# EAGLE board linearni_zdroj (EAGLE 9.5.1)
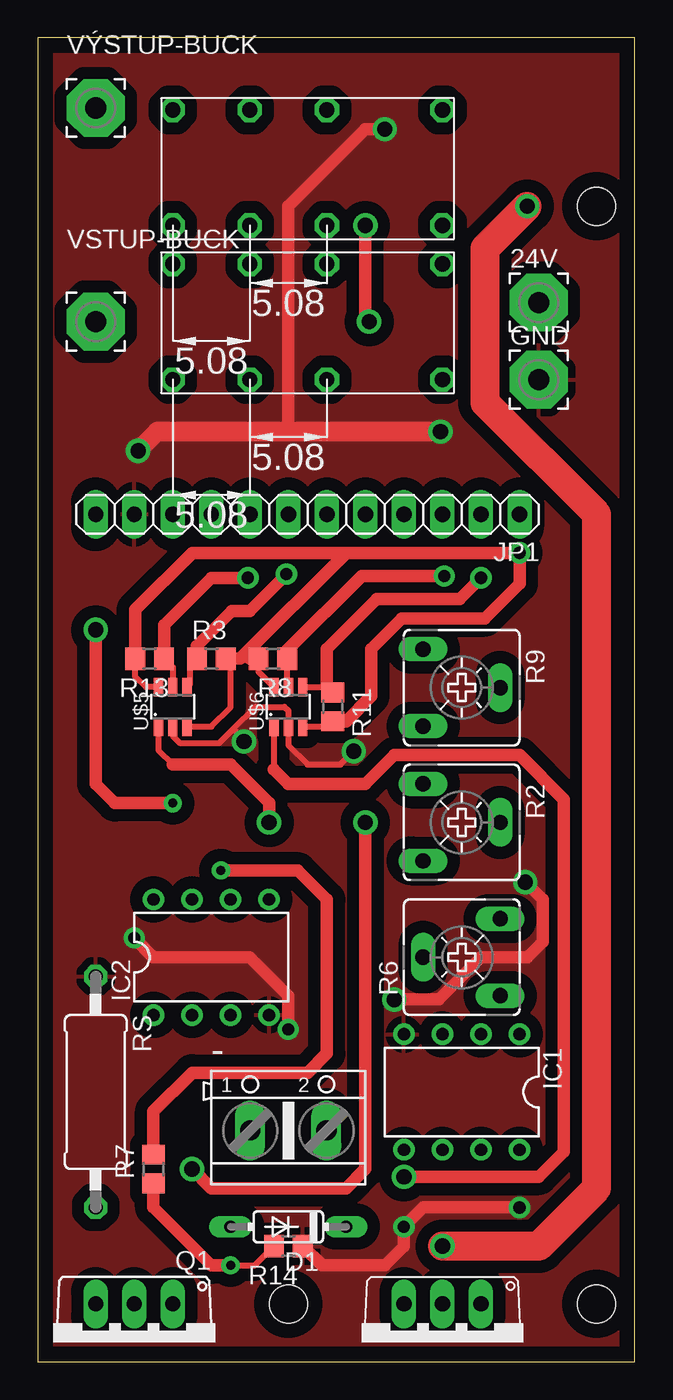
[diagram p0: board, top side]
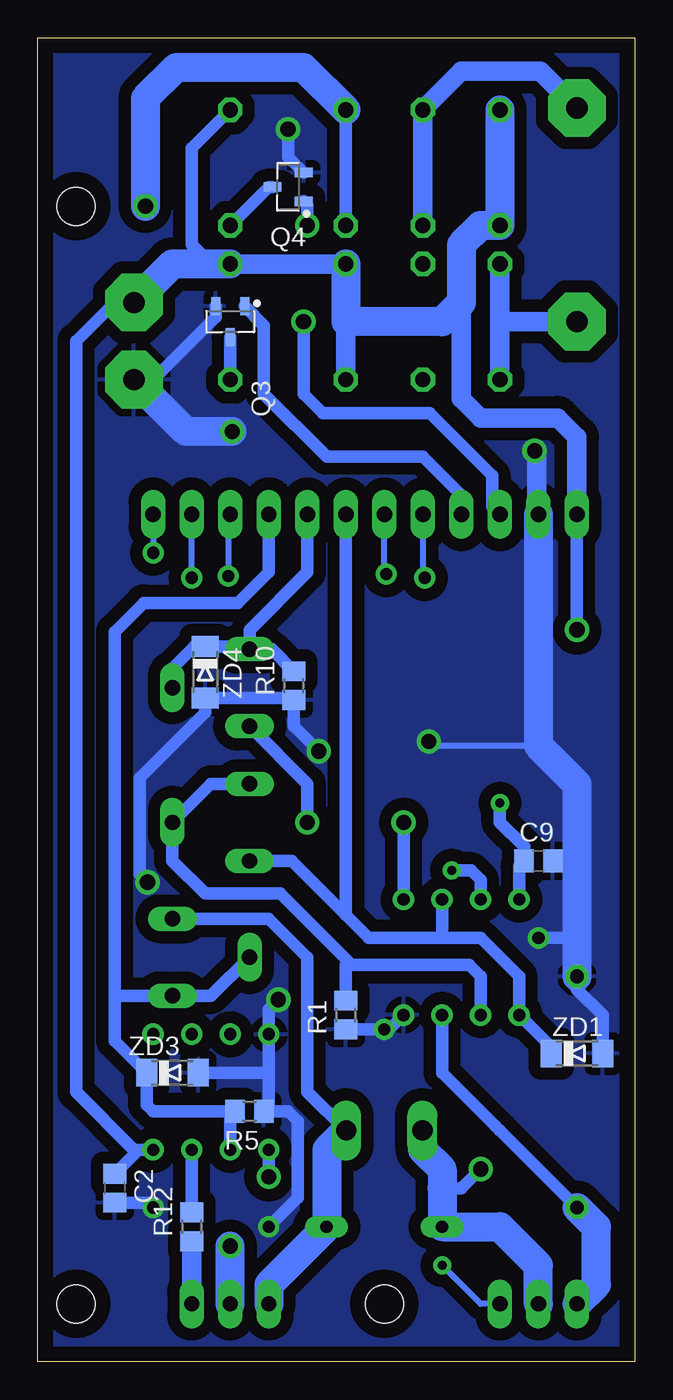
[diagram p1: board, bottom side, seen from below]

Size 39.35 x 87.3 mm. Coordinates in mm from the lower left corner, seen from the top.
Outline: 0,0 39.35,0 39.35,87.3 0,87.3 0,0
Copper layers (1*16): Top 0.035mm / dielectric 1.5mm / Bottom 0.035mm
Design rules "SPS_Trutnov_F14 *": minimum track width 0.3mm, minimum drill 0.6mm, track to track 0.25mm, track to pad 0.2mm, pad to pad 0.2mm, via to via 0.2mm, smd to smd 0mil, copper to edge 1mm, drill to drill 0.6mm, minimum pad ring 0.3mm, minimum via ring 0.3mm, stop-mask expansion 0.1mm, vias tented up to drill 3mm, thermal gap 20mil
Holes 2.5 mm at 36.83,76.2 36.83,3.81 16.51,3.81

## Footprints (pad centres in the part's own frame; a part is rotated, then mirrored left to right if it is on the bottom)
3,81/1,4 = drill 1.397 pad 3.81 octagon: 1 0,0
AK500/2 = drill 1.321 long: 1 -2.515,0; 2 2.515,0
C0805 = smd 1.3 x 1.5: 1 -0.95,0; 2 0.95,0
DO35-7B = drill 0.813 long: A 3.81,0; C -3.81,0
V23105-A5305-A201 = drill 1 octagon: 1 -11.43,-5.08; 4 -3.81,-5.08; 6 1.27,-5.08; 8 6.35,-5.08; 9 6.35,2.54; 11 1.27,2.54; 13 -3.81,2.54; 16 -11.43,2.54
DIL08 = drill 0.813 pad 1.27: 1 -3.81,-3.81; 2 -1.27,-3.81; 3 1.27,-3.81; 4 3.81,-3.81; 5 3.81,3.81; 6 1.27,3.81; 7 -1.27,3.81; 8 -3.81,3.81
1X12 = drill 1.016 long: 1 -13.97,0; 2 -11.43,0; 3 -8.89,0; 4 -6.35,0; 5 -3.81,0; 6 -1.27,0; 7 1.27,0; 8 3.81,0; 9 6.35,0; 10 8.89,0; 11 11.43,0; 12 13.97,0
TO220AV = drill 1.016 long: D 0,-2.54; G -2.54,-2.54; S 2.54,-2.54
TO220V = drill 1.016 long: 1 -2.54,-2.54; 2 0,-2.54; 3 2.54,-2.54
SOT95P240X110-3N = smd 1.182 x 0.612: 1 -1.025,0.95; 2 -1.025,-0.95; 3 1.025,0
R0805 = smd 1.3 x 1.5: 1 -0.95,0; 2 0.95,0
CA6V = drill 1.016 long: A -2.54,-2.54; E 2.54,-2.54; S 0,2.54
0411/15 = drill 0.914 octagon: 1 -7.62,0; 2 7.62,0
TSOT23-6 = smd 0.62 x 1.22: 1 -0.95,-1.3; 2 0,-1.3; 3 0.95,-1.3; 4 0.95,1.3; 5 0,1.3; 6 -0.95,1.3
MINIMELF = smd 1.4 x 1.8: A 1.7,0; C -1.7,0

## Placement (x,y rotation side)
24V  [3,81/1,4]  33.02,69.85 0 top
-  [AK500/2]  16.51,15.24 0 top
C2  10n  [C0805]  34.29,11.43 270 bottom
C9  10n  [C0805]  6.35,33.02 0 bottom
D1  1N4001  [DO35-7B]  16.51,8.89 180 top
ER1  V23105-A5305  [V23105-A5305-A201]  15.24,67.31 180 top
ER2  V23105-A5305  [V23105-A5305-A201]  15.24,77.47 180 top
GND  [3,81/1,4]  33.02,64.77 0 top
IC1  LM358N  [DIL08]  27.94,17.78 180 top
IC2  LM358N  [DIL08]  11.43,26.67 0 top
JP1  [1X12]  17.78,55.88 180 top
Q1  IRFZ34NAV  [TO220AV]  6.35,1.27 180 top
Q2  TIP120  [TO220V]  26.67,1.27 180 top
Q3  2N7002  [SOT95P240X110-3N]  26.67,68.58 270 bottom
Q4  2N7002  [SOT95P240X110-3N]  22.86,77.47 180 bottom
R1  1K  [R0805]  19.05,22.86 90 bottom
R2  10K(9K)  [CA6V]  27.94,35.56 270 top
R3  5K  [R0805]  11.43,46.36 0 top
R5  1K  [R0805]  25.4,16.51 180 bottom
R6  7K(10K)  [CA6V]  27.94,26.67 90 top
R7  20K  [R0805]  7.62,12.7 90 top
R8  5K  [R0805]  15.49,46.36 180 top
R9  10K(7K)  [CA6V]  27.94,44.45 270 top
R10  1K  [R0805]  22.48,44.58 90 bottom
R11  5K  [R0805]  19.43,43.18 270 top
R12  360R  [R0805]  29.21,8.89 90 bottom
R13  5K  [R0805]  7.37,46.36 180 top
R14  100K  [R0805]  16.51,7.62 180 top
RS  0R1  [0411/15]  3.81,17.78 270 top
U$5  MCP4726  [TSOT23-6]  8.89,43.18 0 top
U$6  MCP4726  [TSOT23-6]  16.51,43.18 0 top
VSTUP-BUCK  [3,81/1,4]  3.81,68.58 0 top
VÝSTUP-BUCK  [3,81/1,4]  3.81,82.68 0 top
ZD1  3,3V  [MINIMELF]  3.81,20.32 0 bottom
ZD3  3,3V  [MINIMELF]  30.48,19.05 0 bottom
ZD4  3,3V  [MINIMELF]  28.32,45.47 270 bottom

## Library data of the parts
24V GND VSTUP-BUCK VÝSTUP-BUCK = wirepad
- = con-ptr500; OC_FARNELL: unknown; OC_NEWARK: unknown
C2 C9 = rcl; SPICEPREFIX: C
D1 Q1 ZD1 ZD3 ZD4 = devices
ER1 ER2 = realatka
IC1 IC2 = linear
JP1 = pinhead
Q2 = transistor
Q3 Q4 = NEXPERIA 
R1 R3 R5 R7 R8 R10-R14 RS = rcl; SPICEPREFIX: R
R2 R6 R9 = pot
U$5 U$6 = DAC

## Nets
+: -.2 D1.C Q2.3 R6.E
+3V3: JP1.1 R3.2 R8.2 R11.2 R13.2 U$5.3 U$5.6 U$6.3 U$6.6
+24V: 24V.1 C2.1 C9.1 ER1.1 ER1.4 ER1.13 ER2.1 ER2.8 ER2.9 IC1.8 IC2.8 JP1.12
ADC0: IC2.1 IC2.6 JP1.6 R2.E ZD1.C
ADC1: JP1.5 R9.A R9.S R10.2 ZD4.C
ADC2: IC1.6 JP1.4 R5.2 R6.A R6.S ZD3.C
GND: C2.2 C9.2 GND.1 IC1.4 IC2.4 JP1.11 Q3.2 Q4.2 R1.1 R5.1 R10.1 R14.1 RS.1 U$5.2 U$6.2 ZD1.A ZD3.A ZD4.A
N$1: IC2.7 R7.2
N$2: Q1.G R7.1 R14.2
N$3: IC2.2 R1.2 R2.A R2.S
N$4: Q2.1 R12.1
N$6: IC2.5 U$5.1
N$7: -.1 D1.A Q1.D R9.E
N$9: IC1.5 U$6.1
N$10: ER2.6 ER2.11 VÝSTUP-BUCK.1
N$12: IC1.7 R12.2
N$16: ER1.16 Q3.3
N$17: ER2.16 Q4.3
N$19: ER1.8 ER1.9 VSTUP-BUCK.1
N$20: IC2.3 Q1.S RS.2
NAPAJENI-REG: ER2.4 ER2.13 Q2.2
PA8: JP1.10 Q4.1
PA9: JP1.9 Q3.1
SCL: JP1.8 R13.1 U$5.5
SCL2: JP1.3 R8.1 U$6.5
SDA: JP1.7 R3.1 U$5.4
SDA2: JP1.2 R11.1 U$6.4

## Tracks (layer width: path | path; a pad name or v marks a point on that pad's centre or on a via)
+
  Bottom 0.813: R6.E 24.13,29.21 21.59,26.67 21.59,17.8 -.2
  Bottom 1.905: -.2 20.3,13.97 20.3,8.91 D1.C 24.13,5.08 Q2.3
+3V3  (via drill 0.8)
  Top 0.406: 20.32,42.23 R11.2 19.45,42.22 19.11,41.88 U$6.3 | U$5.3 11.43,41.88 12.7,43.15 12.7,46.36 | R3.2 12.7,46.36 | 13.97,46.36 12.7,46.36 | R8.2 14.54,45.5 U$6.6 | U$5.6 7.13,44.48 6.42,45.19 R13.2
  Top 0.813: 20.32,42.23 21.97,43.88 21.97,46.99 24,49.02 29.46,49.02 31.75,51.31 v31.75,53.34 20.32,53.34 | 20.32,53.34 13.34,46.36 R3.2 | 20.32,53.34 10.16,53.34 6.42,49.6 R13.2 | R8.2 13.97,46.36
  Bottom 0.406: JP1.1 v31.75,53.34
+24V  (via drill 0.6, 1)
  Top 0.813: v8.89,36.83 5.08,36.83 3.81,38.1 v3.81,48.26
  Bottom 0.813: 24V.1 34.29,69.85 36.83,67.31 36.83,17.78 33.02,13.97 IC1.8 32.7,13.97 C2.1 | v3.81,48.26 JP1.12 | IC2.8 7.62,32.7 C9.1 7.3,33.97 8.89,35.56 v8.89,36.83 | ER1.1 27.94,72.39 29.21,73.66 29.21,80.01 ER2.1
  Bottom 1.27: JP1.12 3.81,60.96 5.08,62.23 10.16,62.23 11.43,63.5 11.43,69.85 | ER1.13 19.05,68.58 | ER1.4 ER1.1
  Bottom 1.905: ER2.8 ER2.9 10.16,74.93 11.43,73.66 11.43,69.85 12.7,68.58 19.05,68.58 ER1.4 | ER1.1 30.48,72.39 24V.1
ADC0
  Bottom 0.813: ZD1.C 5.51,20.75 IC2.1 7.62,25.4 10.16,27.94 12.7,27.94 | 12.7,27.94 17.53,27.94 19.05,29.46 | 19.05,29.46 22.61,33.02 R2.E | IC2.6 12.7,27.94 | JP1.6 19.05,29.46
ADC1
  Bottom 0.813: JP1.5 21.59,52.07 25.4,48.26 R9.A | R10.2 23.94,46.99 R9.A | R9.A 25.58,47.17 ZD4.C 29.03,47.17 30.48,45.72 R9.S
ADC2
  Bottom 0.813: IC1.6 26.67,16.19 R5.2 31.75,16.51 32.18,16.94 ZD3.C 34.29,21.16 34.29,24.13 | R6.S 27.94,24.13 R6.A 34.29,24.13 | JP1.4 24.13,52.07 26.16,50.04 32.38,50.04 34.29,48.13 34.29,24.13
GND  (via drill 0.8, 1)
  Top 0.406: v20.83,40.26 19.94,39.37 17.78,39.37 16.51,40.64 U$6.2 16.51,42.93 16.26,43.18 14.35,43.18 12.89,41.72 | U$5.2 8.89,41.28 9.4,40.77 11.94,40.77 12.89,41.72 | 12.89,41.72 13.59,41.02 v13.59,40.89
  Top 0.813: v32.13,31.62 33.27,30.48 33.27,27.69 32.26,26.67 29.21,26.67 26.42,23.88 v23.5,23.88 | v31.75,10.16 25.4,10.16 v24.13,8.89 24.13,7.62 22.86,6.35 18.73,6.35 R14.1 | v16.51,21.91 16.51,24.13 13.97,26.67 7.62,26.67 v6.35,27.94 | 16.51,61.34 16.51,76.2 21.59,81.28 v22.86,81.28
  Top 1.27: v26.54,61.34 16.51,61.34 7.87,61.34 v6.6,60.07
  Bottom 0.406: v13.59,40.89 13.34,40.64 6.35,40.64
  Bottom 0.813: 24.13,19.05 24.13,16.83 R5.1 22.86,16.51 22.23,15.88 22.23,10.79 v24.13,8.89 | 24.13,19.05 IC1.4 24.13,23.24 v23.5,23.88 | ZD3.A 24.13,19.05 | ZD1.A 2.11,22.86 3.81,24.56 RS.1 | v20.83,40.26 22.48,41.91 R10.1 22.62,43.77 ZD4.A 28.32,42.8 32.64,38.48 32.64,32.13 v32.13,31.62 | C9.2 3.81,33.02 | v31.75,10.16 32.07,10.48 C2.2 | R1.1 v16.51,21.91 16.19,21.91 IC2.4 | v6.35,27.94 3.81,27.94 | Q3.2 27.62,68.9 31.75,64.77 GND.1 | v22.86,81.28 22.86,79.44 Q4.2
  Bottom 1.27: v6.6,60.07 6.48,59.94 6.48,56.01 JP1.11
  Bottom 1.905: JP1.11 6.35,40.64 3.81,38.1 3.81,33.02 3.81,27.94 RS.1 | v26.54,61.34 29.59,61.34 GND.1
  pour Top (isolate 0.813): 0,0 39.37,0 39.37,87.25 0,87.25
  pour Bottom (isolate 0.813): 0,0 39.5,0 39.5,87.25 0,87.25
N$1  (via drill 0.6)
  Top 0.813: R7.2 7.62,16.51 10.16,19.05 17.78,19.05 19.05,20.32 19.05,30.48 17.14,32.38 v12.06,32.38
  Bottom 0.813: IC2.7 10.16,31.75 10.79,32.38 v12.06,32.38
N$2  (via drill 0.6)
  Top 0.406: 7.62,11.43 R7.1 | R14.2 14.29,6.35 v12.7,6.35
  Top 0.813: v12.7,6.35 11.43,6.35 7.62,10.16 7.62,11.43
  Bottom 0.406: Q1.G 10.16,3.81 v12.7,6.35
N$3
  Bottom 0.813: R2.A 27.94,38.1 R2.S 30.48,33.02 28.32,30.86 23.37,30.86 18.67,26.16 | IC2.2 10.16,25.4 10.92,26.16 18.67,26.16 | 18.67,26.16 19.05,26.16 R1.2
N$4
  Bottom 1.27: Q2.1 R12.1
N$6  (via drill 1)
  Top 0.406: U$5.1 7.94,40.32 8.89,39.37
  Top 0.813: v15.24,35.56 15.24,36.83 12.7,39.37 8.89,39.37
  Bottom 0.813: IC2.5 v15.24,35.56
N$7  (via drill 1)
  Top 0.813: v10.16,12.7 11.43,11.43 20.32,11.43 21.59,12.7 v21.59,35.56
  Bottom 0.813: R9.E 21.59,38.1 v21.59,35.56 | v10.16,12.7 11.43,11.43 12.7,11.43
  Bottom 1.905: Q1.D 6.35,6.35 8.89,8.89 D1.A 12.7,11.43 12.7,12.7 13.99,13.99 -.1
N$9  (via drill 1)
  Top 0.406: U$6.1 15.56,39.05
  Top 0.813: v24.13,12.19 33.02,12.19 34.67,13.84 34.67,37.08 31.75,40.01 23.5,40.01 21.59,38.1 16.51,38.1 15.56,39.05
  Bottom 0.813: IC1.5 v24.13,12.19
N$10
  Bottom 1.27: VÝSTUP-BUCK.1 6.22,85.09 11.43,85.09 ER2.6 ER2.11
N$12
  Bottom 0.813: R12.2 IC1.7
N$16
  Bottom 0.813: Q3.3 ER1.16
N$17
  Bottom 0.813: Q4.3 24.13,77.47 ER2.16
N$19
  Bottom 1.27: ER1.9 8.89,68.58 | 8.89,68.58 ER1.8 | VSTUP-BUCK.1 8.89,68.58
N$20
  Bottom 0.813: IC2.3 12.7,19.05 9.21,15.56 8.89,15.24 RS.2
  Bottom 1.905: Q1.S 2.54,5.08 2.54,8.89 RS.2
NAPAJENI-REG  (via drill 1)
  Top 1.905: v32.26,76.2 29.46,73.41 29.46,63.25 36.83,55.88 36.83,11.43 33.02,7.62 v26.67,7.62
  Bottom 0.813: ER2.13 ER2.4
  Bottom 1.905: Q2.2 v26.67,7.62 | ER2.4 21.85,85.35 30.22,85.35 32.26,83.31 v32.26,76.2
PA8  (via drill 1)
  Top 0.813: v21.84,68.58 21.59,68.83 v21.59,74.93
  Bottom 0.813: JP1.10 9.4,56.39 9.4,58.42 13.53,62.55 20.57,62.55 21.84,63.82 v21.84,68.58 | v21.59,74.93 21.59,76.27 Q4.1
PA9
  Bottom 0.813: JP1.9 11.43,57.15 13.97,59.69 20.32,59.69 24.45,63.82 24.45,68.33 Q3.1
SCL  (via drill 0.8)
  Top 0.406: R13.1 8.89,45.78 U$5.5
  Top 0.813: v13.84,51.69 11.43,51.69 8.32,48.58 R13.1
  Bottom 0.406: JP1.8 13.97,51.69 v13.84,51.69
SCL2  (via drill 0.8)
  Top 0.406: U$6.5 16.44,44.55 R8.1
  Top 0.813: v26.8,51.82 21.34,51.82 16.44,46.92 R8.1
  Bottom 0.406: JP1.3 26.8,55.75 v26.8,51.82
SDA  (via drill 0.8)
  Top 0.406: U$5.4 10.03,44.67 10.03,46.8 R3.1
  Top 0.813: R3.1 10.48,47.18 12.79,49.5 13.97,49.5 16.38,51.91 v16.38,51.94
  Bottom 0.406: JP1.7 16.51,52.07 v16.38,51.94
SDA2  (via drill 0.8)
  Top 0.406: U$6.4 19.08,44.48 R11.1
  Top 0.813: R11.1 19.05,44.51 19.05,46.99 22.35,50.29 27.81,50.29 v29.21,51.69
  Bottom 0.406: v29.21,51.69 JP1.2